# EAGLE board MicroMod-Teensy-Panel (EAGLE 9.6.2), part 1 of 13
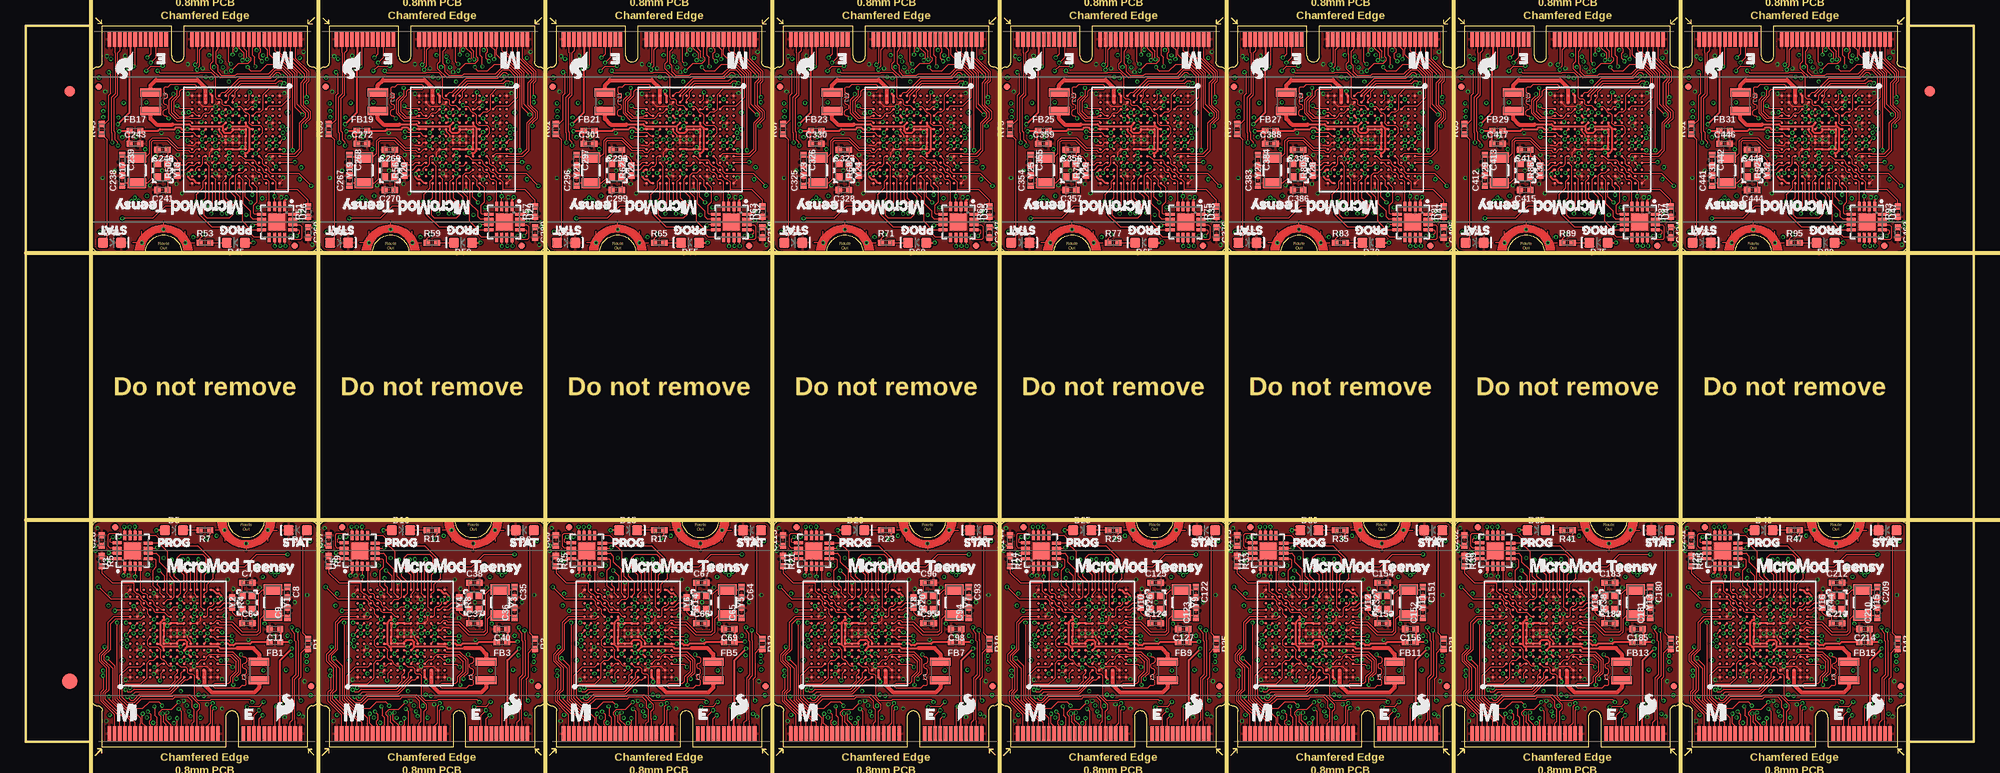
[diagram p0: board, top side]
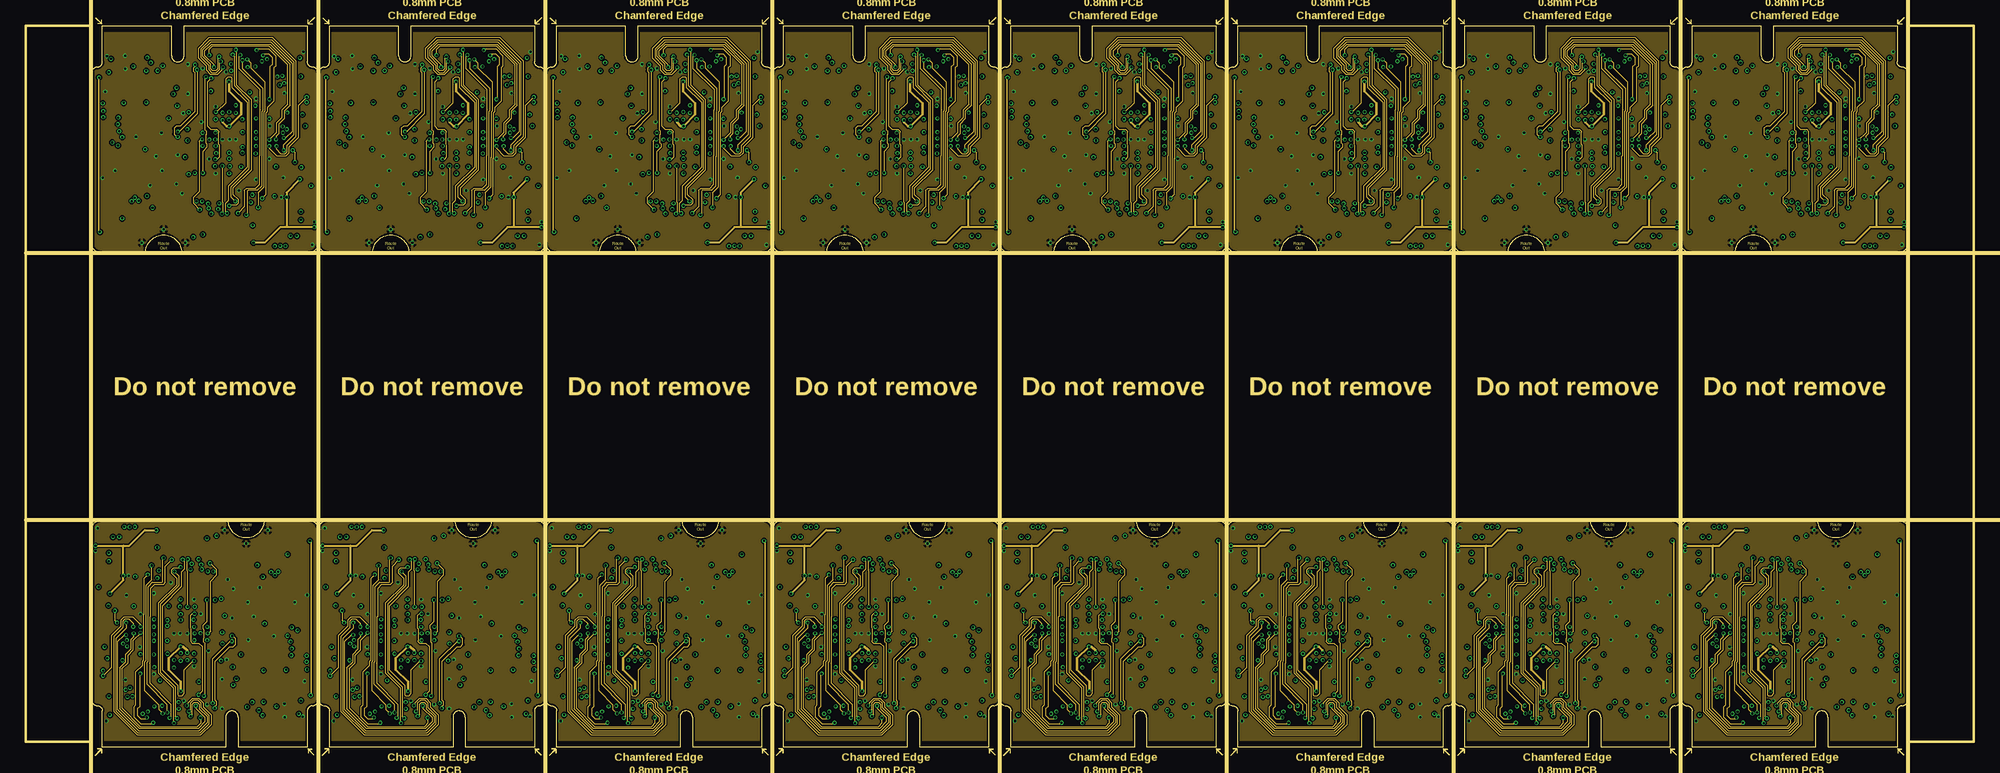
[diagram p1: board, inner layer Route2]
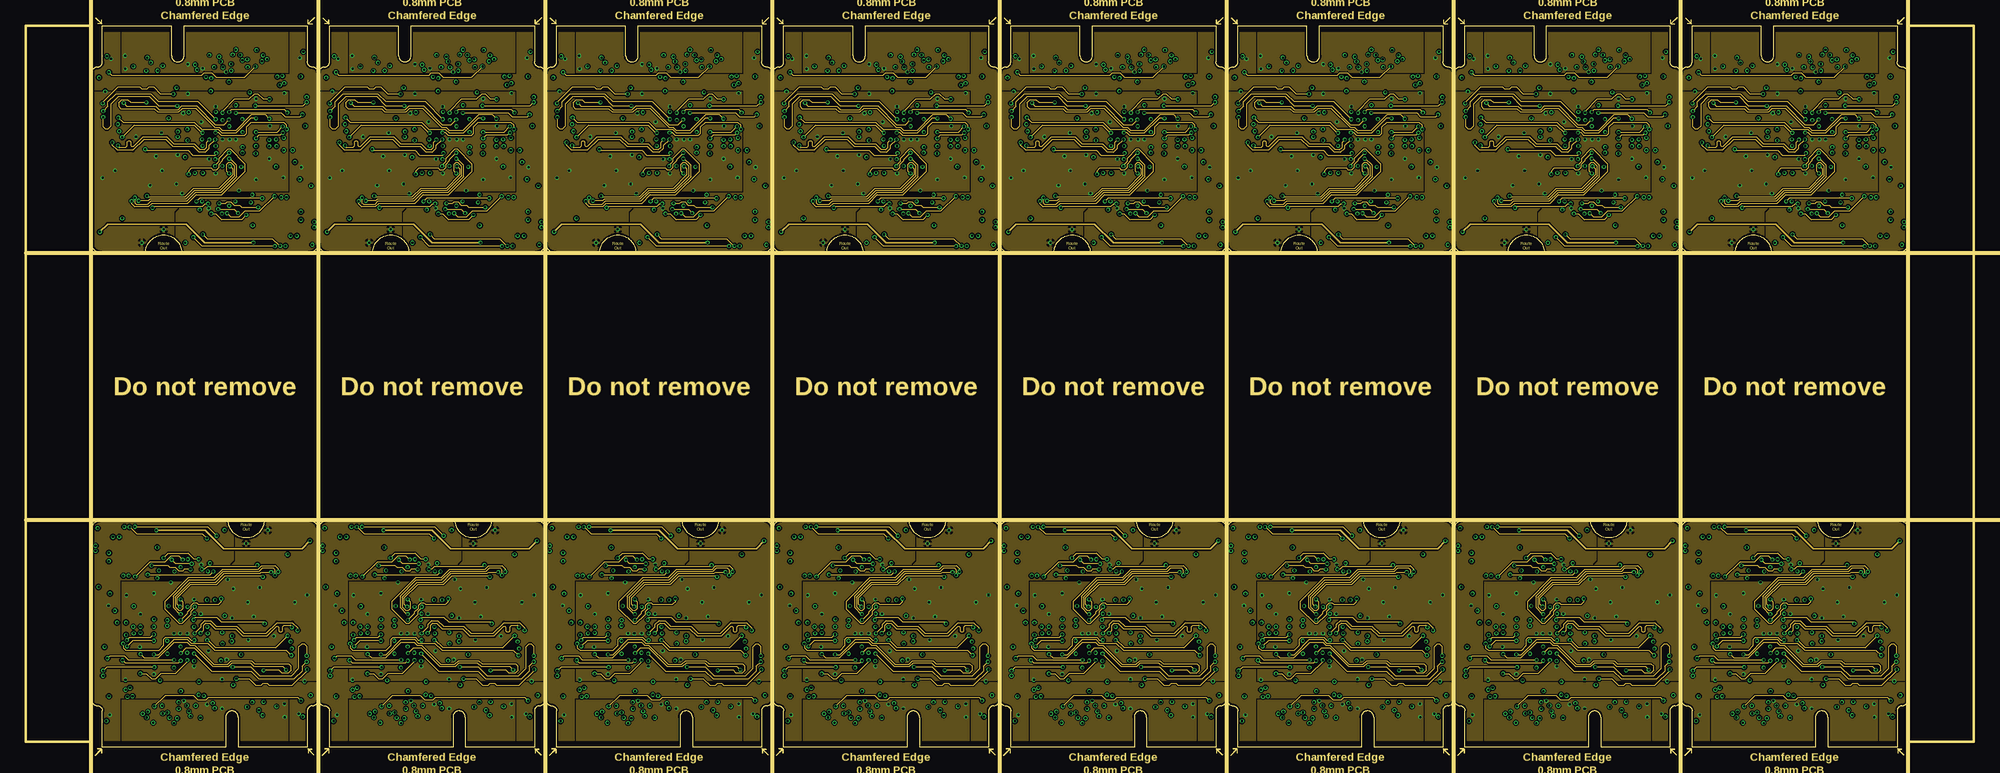
[diagram p2: board, inner layer Route15]
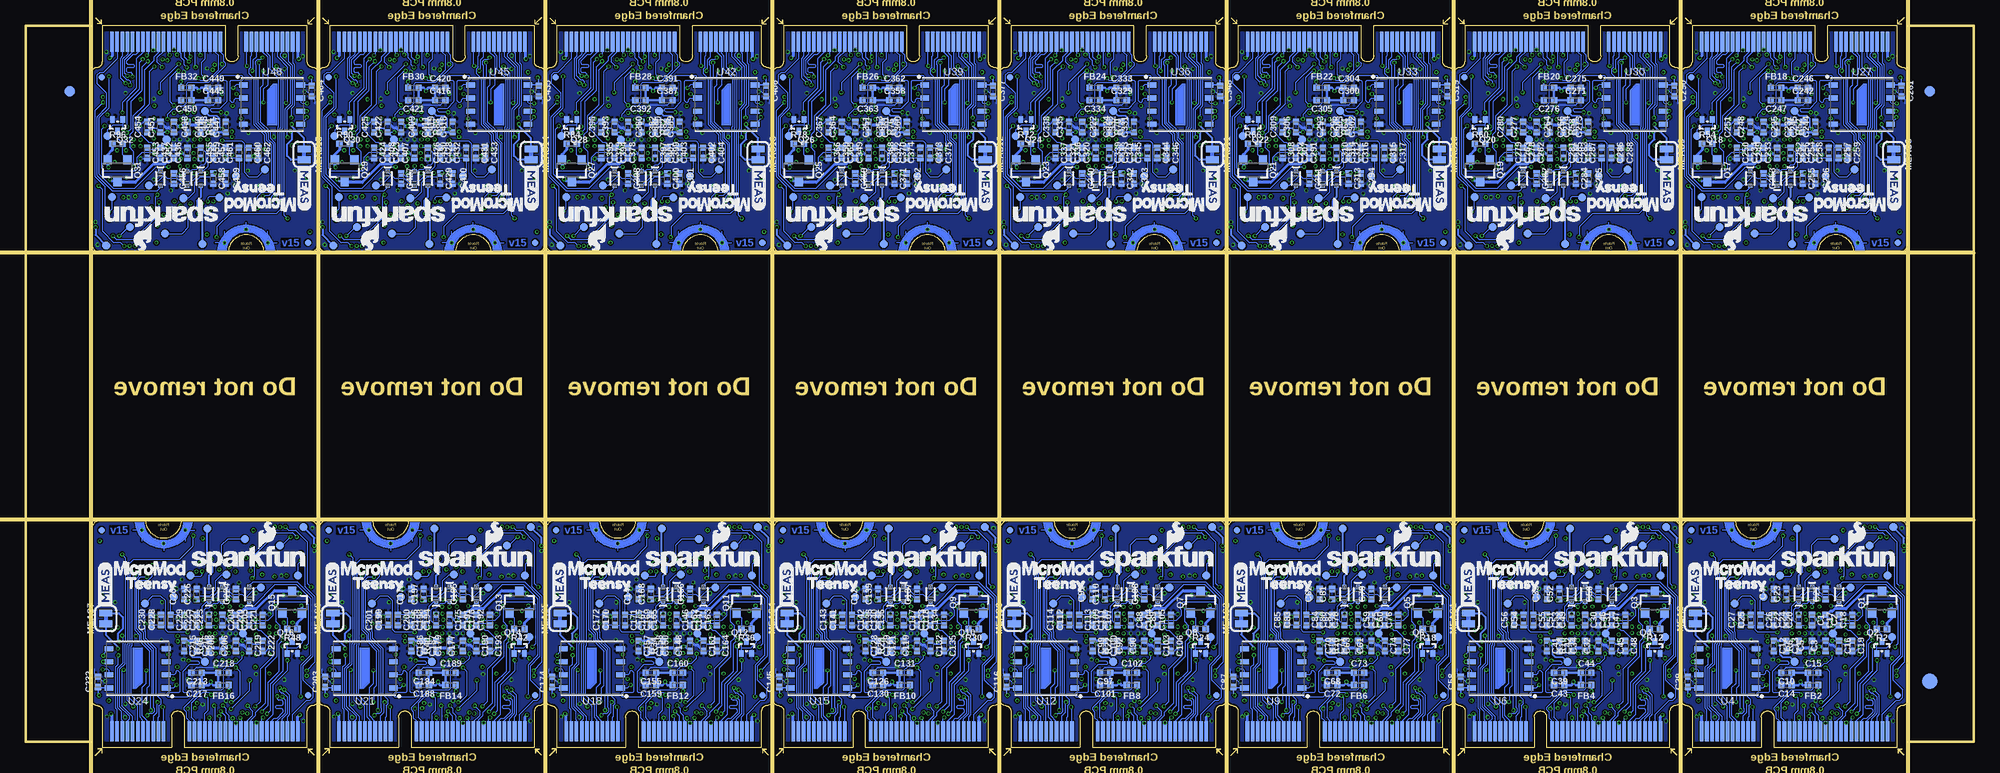
[diagram p3: board, bottom side, seen from below]

Size 188.7 x 69.85 mm. Coordinates in mm from the lower left corner, seen from the top.
Outline: 312 segments
Copper layers (1+2*15+16): Top 0.035mm / dielectric 1.5mm / Route2 0.035mm / dielectric 0.15mm / Route15 0.035mm / dielectric 0.2mm / Bottom 0.035mm
Design rules "MicroMod-Teensy": minimum track width 4mil, minimum drill 0.2mm, track to track 4mil, track to pad 4mil, pad to pad 4mil, via to via 4mil, smd to smd 4mil, copper to edge 6mil, drill to drill 6mil, minimum pad ring 3mil, minimum via ring 3mil, stop-mask expansion 4mil, vias tented up to drill 25mil, thermal gap 10mil
Net classes: 1 90Ohm: width 0.114 mm, clearance 0.127 mm; 2 Clock: width 0.089 mm, clearance 0.178 mm; 3 DCBoost: width 0.381 mm; 4 InternalPower: width 0.152 mm
Milling: 107 lines

## Footprints (pad centres in the part's own frame; a part is rotated, then mirrored left to right if it is on the bottom)
0402-TIGHT = smd 0.6 x 0.6: 1 -0.5,0; 2 0.5,0
LED-0603 = smd 1 x 1: A -0.877,0; C 0.877,0
SOD-523 = smd 0.4 x 0.4: A -0.7,0; C 0.7,0
FIDUCIAL-1X2 = smd 1 x 1: 1 0,0
FIDUCIAL-1.5X3 = smd 1.5 x 1.5: 1 0,0
FIDUCIAL-MICRO = smd 0.635 x 0.635: 1 0,0
M.2-CARD-E-22 = smd 0.35 x 1.45: 1 9.25,1.275; 3 8.75,1.275; 5 8.25,1.275; 7 7.75,1.275; 9 7.25,1.275; 11 6.75,1.275; 13 6.25,1.275; 15 5.75,1.275; 17 5.25,1.275; 19 4.75,1.275; 21 4.25,1.275; 23 3.75,1.275; 33 1.25,1.275; 35 0.75,1.275; 37 0.25,1.275; 39 -0.25,1.275; 41 -0.75,1.275; 43 -1.25,1.275; 45 -1.75,1.275; 47 -2.25,1.275; 49 -2.75,1.275; 51 -3.25,1.275; 53 -3.75,1.275; 55 -4.25,1.275; 57 -4.75,1.275; 59 -5.25,1.275; 61 -5.75,1.275; 63 -6.25,1.275; 65 -6.75,1.275; 67 -7.25,1.275; 69 -7.75,1.275; 71 -8.25,1.275; 73 -8.75,1.275; 75 -9.25,1.275 | smd 0.35 x 1.95 bottom: 2 9,1.525; 4 8.5,1.525; 6 8,1.525; 8 7.5,1.525; 10 7,1.525; 12 6.5,1.525; 14 6,1.525; 16 5.5,1.525; 18 5,1.525; 20 4.5,1.525; 22 4,1.525; 32 1.5,1.525; 34 1,1.525; 36 0.5,1.525; 38 0,1.525; 40 -0.5,1.525; 42 -1,1.525; 44 -1.5,1.525; 46 -2,1.525; 48 -2.5,1.525; 50 -3,1.525; 52 -3.5,1.525; 54 -4,1.525; 56 -4.5,1.525; 58 -5,1.525; 60 -5.5,1.525; 62 -6,1.525; 64 -6.5,1.525; 66 -7,1.525; 68 -7.5,1.525; 70 -8,1.525; 72 -8.5,1.525; 74 -9,1.525 | drill 0.2: GND1 1.9,21; GND2 4,19.7; GND3 6.1,21
1008(2520) = smd 0.8 x 2: 1 -0.9,0; 2 0.9,0
SMT-JUMPER_2_NC_TRACE_SILK = smd 0.66 x 1.27: 1 -0.521,0; 2 0.521,0
SOT23-3 = smd 0.8 x 0.9: 1 -0.95,-1; 2 0.95,-1; 3 0,1.1
SOT-416FL = smd 0.46 x 0.65: 1 -0.5,-1.1; 2 0.5,-1.1; 3 0,0.05
PAD.03X.03 = smd 0.762 x 0.762: P$1 0,0
IMXRT1062 = smd 0.234 x 0.234: A1 -4.225,4.225; A2 -3.575,4.225; A3 -2.925,4.225; A4 -2.275,4.225; A5 -1.625,4.225; A6 -0.975,4.225; A7 -0.325,4.225; A8 0.325,4.225; A9 0.975,4.225; A10 1.625,4.225; A11 2.275,4.225; A12 2.925,4.225; A13 3.575,4.225; A14 4.225,4.225; B1 -4.225,3.575; B2 -3.575,3.575; B3 -2.925,3.575; B4 -2.275,3.575; B5 -1.625,3.575; B6 -0.975,3.575; B7 -0.325,3.575; B8 0.325,3.575; B9 0.975,3.575; B10 1.625,3.575; B11 2.275,3.575; B12 2.925,3.575; B13 3.575,3.575; B14 4.225,3.575; C1 -4.225,2.925; C2 -3.575,2.925; C3 -2.925,2.925; C4 -2.275,2.925; C5 -1.625,2.925; C6 -0.975,2.925; C7 -0.325,2.925; C8 0.325,2.925; C9 0.975,2.925; C10 1.625,2.925; C11 2.275,2.925; C12 2.925,2.925; C13 3.575,2.925; C14 4.225,2.925; D1 -4.225,2.275; D2 -3.575,2.275; D3 -2.925,2.275; D4 -2.275,2.275; D5 -1.625,2.275; D6 -0.975,2.275; D7 -0.325,2.275; D8 0.325,2.275; D9 0.975,2.275; D10 1.625,2.275; D11 2.275,2.275; D12 2.925,2.275; D13 3.575,2.275; D14 4.225,2.275; E1 -4.225,1.625; E2 -3.575,1.625; E3 -2.925,1.625; E4 -2.275,1.625; E5 -1.625,1.625; E6 -0.975,1.625; E7 -0.325,1.625; E8 0.325,1.625; E9 0.975,1.625; E10 1.625,1.625; E11 2.275,1.625; E12 2.925,1.625; E13 3.575,1.625; E14 4.225,1.625; F1 -4.225,0.975; F2 -3.575,0.975; F3 -2.925,0.975; F4 -2.275,0.975; F5 -1.625,0.975; F6 -0.975,0.975; F7 -0.325,0.975; F8 0.325,0.975; F9 0.975,0.975; F10 1.625,0.975; F11 2.275,0.975; F12 2.925,0.975; F13 3.575,0.975; F14 4.225,0.975; G1 -4.225,0.325; G2 -3.575,0.325; G3 -2.925,0.325; G4 -2.275,0.325; G5 -1.625,0.325; G6 -0.975,0.325; G7 -0.325,0.325; G8 0.325,0.325; G9 0.975,0.325; G10 1.625,0.325; G11 2.275,0.325; G12 2.925,0.325; G13 3.575,0.325; G14 4.225,0.325; H1 -4.225,-0.325; H2 -3.575,-0.325; H3 -2.925,-0.325; H4 -2.275,-0.325; H5 -1.625,-0.325; H6 -0.975,-0.325; H7 -0.325,-0.325; H8 0.325,-0.325; H9 0.975,-0.325; H10 1.625,-0.325; H11 2.275,-0.325; H12 2.925,-0.325; H13 3.575,-0.325; H14 4.225,-0.325; J1 -4.225,-0.975; J2 -3.575,-0.975; J3 -2.925,-0.975; J4 -2.275,-0.975; J5 -1.625,-0.975; J6 -0.975,-0.975; J7 -0.325,-0.975; J8 0.325,-0.975; J9 0.975,-0.975; J10 1.625,-0.975; J11 2.275,-0.975; J12 2.925,-0.975; J13 3.575,-0.975; J14 4.225,-0.975; K1 -4.225,-1.625; K2 -3.575,-1.625; K3 -2.925,-1.625; K4 -2.275,-1.625; K5 -1.625,-1.625; K6 -0.975,-1.625; K7 -0.325,-1.625; K8 0.325,-1.625; K9 0.975,-1.625; K10 1.625,-1.625; K11 2.275,-1.625; K12 2.925,-1.625; K13 3.575,-1.625; K14 4.225,-1.625; L1 -4.225,-2.275; L2 -3.575,-2.275; L3 -2.925,-2.275; L4 -2.275,-2.275; L5 -1.625,-2.275; L6 -0.975,-2.275; L7 -0.325,-2.275; L8 0.325,-2.275; L9 0.975,-2.275; L10 1.625,-2.275; L11 2.275,-2.275; L12 2.925,-2.275; L13 3.575,-2.275; L14 4.225,-2.275; M1 -4.225,-2.925; M2 -3.575,-2.925; M3 -2.925,-2.925; M4 -2.275,-2.925; M5 -1.625,-2.925; M6 -0.975,-2.925; M7 -0.325,-2.925; M8 0.325,-2.925; M9 0.975,-2.925; M10 1.625,-2.925; M11 2.275,-2.925; M12 2.925,-2.925; M13 3.575,-2.925; M14 4.225,-2.925; N1 -4.225,-3.575; N2 -3.575,-3.575; N3 -2.925,-3.575; N4 -2.275,-3.575; N5 -1.625,-3.575; N6 -0.975,-3.575; N7 -0.325,-3.575; N8 0.325,-3.575; N9 0.975,-3.575; N10 1.625,-3.575; N11 2.275,-3.575; N12 2.925,-3.575; N13 3.575,-3.575; N14 4.225,-3.575; P1 -4.225,-4.225; P2 -3.575,-4.225; P3 -2.925,-4.225; P4 -2.275,-4.225; P5 -1.625,-4.225; P6 -0.975,-4.225; P7 -0.325,-4.225; P8 0.325,-4.225; P9 0.975,-4.225; P10 1.625,-4.225; P11 2.275,-4.225; P12 2.925,-4.225; P13 3.575,-4.225; P14 4.225,-4.225
QFN-16 = smd 0.9 x 0.29: 1 -1.5,0.75; 2 -1.5,0.25; 3 -1.5,-0.25; 4 -1.5,-0.75; 9 1.5,-0.75; 10 1.5,-0.25; 11 1.5,0.25; 12 1.5,0.75 | smd 0.29 x 0.9: 5 -0.75,-1.5; 6 -0.25,-1.5; 7 0.25,-1.5; 8 0.75,-1.5; 13 0.765,1.5; 14 0.25,1.5; 15 -0.25,1.5; 16 -0.75,1.5 | smd 1.6 x 1.6: 17 0,0
WSON-8-6X5-SKINNY_CENTERPAD = smd 0.85 x 0.5: 1 -2.775,1.905; 2 -2.775,0.635; 3 -2.775,-0.635; 4 -2.775,-1.905; 5 2.775,-1.905; 6 2.775,-0.635; 7 2.775,0.635; 8 2.775,1.905
CRYSTAL-SMD-3.2X1.5MM = smd 1 x 1.8: P$1 -1.25,0; P$2 1.25,0
CRYSTAL-SMD-2.0X1.6MM = smd 0.75 x 0.7: 1 -0.675,-0.5; 2 0.675,-0.5; 3 0.675,0.5; 4 -0.675,0.5

## Placement (x,y rotation side)
C1  2.2uF  [0402-TIGHT]  15.65,12.3 270 bottom
C2  4.7uF  [0402-TIGHT]  14.35,12.3 270 bottom
C3  0.22uF  [0402-TIGHT]  14.35,9.8 90 bottom
C4  0.22uF  [0402-TIGHT]  19.35,14.8 90 bottom
C5  10nF  [0402-TIGHT]  15.65,9.8 90 bottom
C6  12pF  [0402-TIGHT]  21.45,12 0 top
C7  12pF  [0402-TIGHT]  21.45,15.9 0 top
C8  20pF  [0402-TIGHT]  25.35,15 270 top
C9  20pF  [0402-TIGHT]  25.35,13 90 top
C10  10uF  [0402-TIGHT]  18.15,7.2 180 bottom
C11  2.2uF  [0402-TIGHT]  24.13,11.43 180 top
C12  0.22uF  [0402-TIGHT]  19.35,9.8 270 bottom
C13  0.22uF  [0402-TIGHT]  18.15,9.8 270 bottom
C14  4.7uF  [0402-TIGHT]  18.15,6 180 bottom
C15  0.22uF  [0402-TIGHT]  15.55,7.2 0 bottom
C16  10nF  [0402-TIGHT]  13.05,9.8 270 bottom
C17  0.22uF  [0402-TIGHT]  13.05,12.3 90 bottom
C18  4.7uF  [0402-TIGHT]  11.75,12.3 90 bottom
C19  10uF  [0402-TIGHT]  11.75,9.8 270 bottom
C20  0.22uF  [0402-TIGHT]  16.95,12.3 90 bottom
C21  10uF  [0402-TIGHT]  14.35,14.8 90 bottom
C22  0.22uF  [0402-TIGHT]  18.15,12.3 90 bottom
C23  0.22uF  [0402-TIGHT]  18.15,14.8 90 bottom
C24  0.22uF  [0402-TIGHT]  19.35,12.3 270 bottom
C25  0.22uF  [0402-TIGHT]  21.6,12.31 90 bottom
C26  4.7uF  [0402-TIGHT]  20.65,12.3 270 bottom
C27  4.7uF  [0402-TIGHT]  22.55,12.31 90 bottom
C28  0.22uF  [0402-TIGHT]  7.35,20 90 top
C29  0.22uF  [0402-TIGHT]  27.7,6.31 90 bottom
C30  2.2uF  [0402-TIGHT]  37.65,12.3 270 bottom
C31  4.7uF  [0402-TIGHT]  36.35,12.3 270 bottom
C32  0.22uF  [0402-TIGHT]  36.35,9.8 90 bottom
C33  0.22uF  [0402-TIGHT]  41.35,14.8 90 bottom
C34  10nF  [0402-TIGHT]  37.65,9.8 90 bottom
C35  20pF  [0402-TIGHT]  47.35,15 270 top
C36  20pF  [0402-TIGHT]  47.35,13 90 top
C37  12pF  [0402-TIGHT]  43.45,12 0 top
C38  12pF  [0402-TIGHT]  43.45,15.9 0 top
C39  10uF  [0402-TIGHT]  40.15,7.2 180 bottom
C40  2.2uF  [0402-TIGHT]  46.13,11.43 180 top
C41  0.22uF  [0402-TIGHT]  41.35,9.8 270 bottom
C42  0.22uF  [0402-TIGHT]  40.15,9.8 270 bottom
C43  4.7uF  [0402-TIGHT]  40.15,6 180 bottom
C44  0.22uF  [0402-TIGHT]  37.55,7.2 0 bottom
C45  10nF  [0402-TIGHT]  35.05,9.8 270 bottom
C46  0.22uF  [0402-TIGHT]  35.05,12.3 90 bottom
C47  4.7uF  [0402-TIGHT]  33.75,12.3 90 bottom
C48  10uF  [0402-TIGHT]  33.75,9.8 270 bottom
C49  0.22uF  [0402-TIGHT]  38.95,12.3 90 bottom
C50  10uF  [0402-TIGHT]  36.35,14.8 90 bottom
C51  0.22uF  [0402-TIGHT]  40.15,12.3 90 bottom
C52  0.22uF  [0402-TIGHT]  40.15,14.8 90 bottom
C53  0.22uF  [0402-TIGHT]  41.35,12.3 270 bottom
C54  0.22uF  [0402-TIGHT]  43.6,12.31 90 bottom
C55  4.7uF  [0402-TIGHT]  42.65,12.3 270 bottom
C56  4.7uF  [0402-TIGHT]  44.55,12.31 90 bottom
C57  0.22uF  [0402-TIGHT]  29.35,20 90 top
C58  0.22uF  [0402-TIGHT]  49.7,6.31 90 bottom
C59  2.2uF  [0402-TIGHT]  59.65,12.3 270 bottom
C60  4.7uF  [0402-TIGHT]  58.35,12.3 270 bottom
C61  0.22uF  [0402-TIGHT]  58.35,9.8 90 bottom
C62  0.22uF  [0402-TIGHT]  63.35,14.8 90 bottom
C63  10nF  [0402-TIGHT]  59.65,9.8 90 bottom
C64  20pF  [0402-TIGHT]  69.35,15 270 top
C65  20pF  [0402-TIGHT]  69.35,13 90 top
C66  12pF  [0402-TIGHT]  65.45,12 0 top
C67  12pF  [0402-TIGHT]  65.45,15.9 0 top
C68  10uF  [0402-TIGHT]  62.15,7.2 180 bottom
C69  2.2uF  [0402-TIGHT]  68.13,11.43 180 top
C70  0.22uF  [0402-TIGHT]  63.35,9.8 270 bottom
C71  0.22uF  [0402-TIGHT]  62.15,9.8 270 bottom
C72  4.7uF  [0402-TIGHT]  62.15,6 180 bottom
C73  0.22uF  [0402-TIGHT]  59.55,7.2 0 bottom
C74  10nF  [0402-TIGHT]  57.05,9.8 270 bottom
C75  0.22uF  [0402-TIGHT]  57.05,12.3 90 bottom
C76  4.7uF  [0402-TIGHT]  55.75,12.3 90 bottom
C77  10uF  [0402-TIGHT]  55.75,9.8 270 bottom
C78  0.22uF  [0402-TIGHT]  60.95,12.3 90 bottom
C79  10uF  [0402-TIGHT]  58.35,14.8 90 bottom
C80  0.22uF  [0402-TIGHT]  62.15,12.3 90 bottom
C81  0.22uF  [0402-TIGHT]  62.15,14.8 90 bottom
C82  0.22uF  [0402-TIGHT]  63.35,12.3 270 bottom
C83  0.22uF  [0402-TIGHT]  65.6,12.31 90 bottom
C84  4.7uF  [0402-TIGHT]  64.65,12.3 270 bottom
C85  4.7uF  [0402-TIGHT]  66.55,12.31 90 bottom
C86  0.22uF  [0402-TIGHT]  51.35,20 90 top
C87  0.22uF  [0402-TIGHT]  71.7,6.31 90 bottom
C88  2.2uF  [0402-TIGHT]  81.65,12.3 270 bottom
C89  4.7uF  [0402-TIGHT]  80.35,12.3 270 bottom
C90  0.22uF  [0402-TIGHT]  80.35,9.8 90 bottom
C91  0.22uF  [0402-TIGHT]  85.35,14.8 90 bottom
C92  10nF  [0402-TIGHT]  81.65,9.8 90 bottom
C93  20pF  [0402-TIGHT]  91.35,15 270 top
C94  20pF  [0402-TIGHT]  91.35,13 90 top
C95  12pF  [0402-TIGHT]  87.45,12 0 top
C96  12pF  [0402-TIGHT]  87.45,15.9 0 top
C97  10uF  [0402-TIGHT]  84.15,7.2 180 bottom
C98  2.2uF  [0402-TIGHT]  90.13,11.43 180 top
C99  0.22uF  [0402-TIGHT]  85.35,9.8 270 bottom
C100  0.22uF  [0402-TIGHT]  84.15,9.8 270 bottom
C101  4.7uF  [0402-TIGHT]  84.15,6 180 bottom
C102  0.22uF  [0402-TIGHT]  81.55,7.2 0 bottom
C103  10nF  [0402-TIGHT]  79.05,9.8 270 bottom
C104  0.22uF  [0402-TIGHT]  79.05,12.3 90 bottom
C105  4.7uF  [0402-TIGHT]  77.75,12.3 90 bottom
C106  10uF  [0402-TIGHT]  77.75,9.8 270 bottom
C107  0.22uF  [0402-TIGHT]  82.95,12.3 90 bottom
C108  10uF  [0402-TIGHT]  80.35,14.8 90 bottom
C109  0.22uF  [0402-TIGHT]  84.15,12.3 90 bottom
C110  0.22uF  [0402-TIGHT]  84.15,14.8 90 bottom
C111  0.22uF  [0402-TIGHT]  85.35,12.3 270 bottom
C112  0.22uF  [0402-TIGHT]  87.6,12.31 90 bottom
C113  4.7uF  [0402-TIGHT]  86.65,12.3 270 bottom
C114  4.7uF  [0402-TIGHT]  88.55,12.31 90 bottom
C115  0.22uF  [0402-TIGHT]  73.35,20 90 top
C116  0.22uF  [0402-TIGHT]  93.7,6.31 90 bottom
C117  2.2uF  [0402-TIGHT]  103.65,12.3 270 bottom
C118  4.7uF  [0402-TIGHT]  102.35,12.3 270 bottom
C119  0.22uF  [0402-TIGHT]  102.35,9.8 90 bottom
C120  0.22uF  [0402-TIGHT]  107.35,14.8 90 bottom
C121  10nF  [0402-TIGHT]  103.65,9.8 90 bottom
C122  20pF  [0402-TIGHT]  113.35,15 270 top
C123  20pF  [0402-TIGHT]  113.35,13 90 top
C124  12pF  [0402-TIGHT]  109.45,12 0 top
C125  12pF  [0402-TIGHT]  109.45,15.9 0 top
C126  10uF  [0402-TIGHT]  106.15,7.2 180 bottom
C127  2.2uF  [0402-TIGHT]  112.13,11.43 180 top
C128  0.22uF  [0402-TIGHT]  107.35,9.8 270 bottom
C129  0.22uF  [0402-TIGHT]  106.15,9.8 270 bottom
C130  4.7uF  [0402-TIGHT]  106.15,6 180 bottom
C131  0.22uF  [0402-TIGHT]  103.55,7.2 0 bottom
C132  10nF  [0402-TIGHT]  101.05,9.8 270 bottom
C133  0.22uF  [0402-TIGHT]  101.05,12.3 90 bottom
C134  4.7uF  [0402-TIGHT]  99.75,12.3 90 bottom
C135  10uF  [0402-TIGHT]  99.75,9.8 270 bottom
C136  0.22uF  [0402-TIGHT]  104.95,12.3 90 bottom
C137  10uF  [0402-TIGHT]  102.35,14.8 90 bottom
C138  0.22uF  [0402-TIGHT]  106.15,12.3 90 bottom
C139  0.22uF  [0402-TIGHT]  106.15,14.8 90 bottom
C140  0.22uF  [0402-TIGHT]  107.35,12.3 270 bottom
C141  0.22uF  [0402-TIGHT]  109.6,12.31 90 bottom
C142  4.7uF  [0402-TIGHT]  108.65,12.3 270 bottom
C143  4.7uF  [0402-TIGHT]  110.55,12.31 90 bottom
C144  0.22uF  [0402-TIGHT]  95.35,20 90 top
C145  0.22uF  [0402-TIGHT]  115.7,6.31 90 bottom
C146  2.2uF  [0402-TIGHT]  125.65,12.3 270 bottom
C147  4.7uF  [0402-TIGHT]  124.35,12.3 270 bottom
C148  0.22uF  [0402-TIGHT]  124.35,9.8 90 bottom
C149  0.22uF  [0402-TIGHT]  129.35,14.8 90 bottom
C150  10nF  [0402-TIGHT]  125.65,9.8 90 bottom
C151  20pF  [0402-TIGHT]  135.35,15 270 top
C152  20pF  [0402-TIGHT]  135.35,13 90 top
C153  12pF  [0402-TIGHT]  131.45,12 0 top
C154  12pF  [0402-TIGHT]  131.45,15.9 0 top
C155  10uF  [0402-TIGHT]  128.15,7.2 180 bottom
C156  2.2uF  [0402-TIGHT]  134.13,11.43 180 top
C157  0.22uF  [0402-TIGHT]  129.35,9.8 270 bottom
C158  0.22uF  [0402-TIGHT]  128.15,9.8 270 bottom
C159  4.7uF  [0402-TIGHT]  128.15,6 180 bottom
C160  0.22uF  [0402-TIGHT]  125.55,7.2 0 bottom
C161  10nF  [0402-TIGHT]  123.05,9.8 270 bottom
C162  0.22uF  [0402-TIGHT]  123.05,12.3 90 bottom
C163  4.7uF  [0402-TIGHT]  121.75,12.3 90 bottom
C164  10uF  [0402-TIGHT]  121.75,9.8 270 bottom
C165  0.22uF  [0402-TIGHT]  126.95,12.3 90 bottom
C166  10uF  [0402-TIGHT]  124.35,14.8 90 bottom
C167  0.22uF  [0402-TIGHT]  128.15,12.3 90 bottom
C168  0.22uF  [0402-TIGHT]  128.15,14.8 90 bottom
C169  0.22uF  [0402-TIGHT]  129.35,12.3 270 bottom
C170  0.22uF  [0402-TIGHT]  131.6,12.31 90 bottom
C171  4.7uF  [0402-TIGHT]  130.65,12.3 270 bottom
C172  4.7uF  [0402-TIGHT]  132.55,12.31 90 bottom
C173  0.22uF  [0402-TIGHT]  117.35,20 90 top
C174  0.22uF  [0402-TIGHT]  137.7,6.31 90 bottom
C175  2.2uF  [0402-TIGHT]  147.65,12.3 270 bottom
C176  4.7uF  [0402-TIGHT]  146.35,12.3 270 bottom
C177  0.22uF  [0402-TIGHT]  146.35,9.8 90 bottom
C178  0.22uF  [0402-TIGHT]  151.35,14.8 90 bottom
C179  10nF  [0402-TIGHT]  147.65,9.8 90 bottom
C180  20pF  [0402-TIGHT]  157.35,15 270 top
C181  20pF  [0402-TIGHT]  157.35,13 90 top
C182  12pF  [0402-TIGHT]  153.45,12 0 top
C183  12pF  [0402-TIGHT]  153.45,15.9 0 top
C184  10uF  [0402-TIGHT]  150.15,7.2 180 bottom
C185  2.2uF  [0402-TIGHT]  156.13,11.43 180 top
C186  0.22uF  [0402-TIGHT]  151.35,9.8 270 bottom
C187  0.22uF  [0402-TIGHT]  150.15,9.8 270 bottom
C188  4.7uF  [0402-TIGHT]  150.15,6 180 bottom
C189  0.22uF  [0402-TIGHT]  147.55,7.2 0 bottom
C190  10nF  [0402-TIGHT]  145.05,9.8 270 bottom
C191  0.22uF  [0402-TIGHT]  145.05,12.3 90 bottom
C192  4.7uF  [0402-TIGHT]  143.75,12.3 90 bottom
C193  10uF  [0402-TIGHT]  143.75,9.8 270 bottom
C194  0.22uF  [0402-TIGHT]  148.95,12.3 90 bottom
C195  10uF  [0402-TIGHT]  146.35,14.8 90 bottom
C196  0.22uF  [0402-TIGHT]  150.15,12.3 90 bottom
C197  0.22uF  [0402-TIGHT]  150.15,14.8 90 bottom
C198  0.22uF  [0402-TIGHT]  151.35,12.3 270 bottom
C199  0.22uF  [0402-TIGHT]  153.6,12.31 90 bottom
C200  4.7uF  [0402-TIGHT]  152.65,12.3 270 bottom
C201  4.7uF  [0402-TIGHT]  154.55,12.31 90 bottom
C202  0.22uF  [0402-TIGHT]  139.35,20 90 top
C203  0.22uF  [0402-TIGHT]  159.7,6.31 90 bottom
C204  2.2uF  [0402-TIGHT]  169.65,12.3 270 bottom
C205  4.7uF  [0402-TIGHT]  168.35,12.3 270 bottom
C206  0.22uF  [0402-TIGHT]  168.35,9.8 90 bottom
C207  0.22uF  [0402-TIGHT]  173.35,14.8 90 bottom
C208  10nF  [0402-TIGHT]  169.65,9.8 90 bottom
C209  20pF  [0402-TIGHT]  179.35,15 270 top
C210  20pF  [0402-TIGHT]  179.35,13 90 top
C211  12pF  [0402-TIGHT]  175.45,12 0 top
C212  12pF  [0402-TIGHT]  175.45,15.9 0 top
C213  10uF  [0402-TIGHT]  172.15,7.2 180 bottom
C214  2.2uF  [0402-TIGHT]  178.13,11.43 180 top
C215  0.22uF  [0402-TIGHT]  173.35,9.8 270 bottom
C216  0.22uF  [0402-TIGHT]  172.15,9.8 270 bottom
C217  4.7uF  [0402-TIGHT]  172.15,6 180 bottom
C218  0.22uF  [0402-TIGHT]  169.55,7.2 0 bottom
C219  10nF  [0402-TIGHT]  167.05,9.8 270 bottom
C220  0.22uF  [0402-TIGHT]  167.05,12.3 90 bottom
C221  4.7uF  [0402-TIGHT]  165.75,12.3 90 bottom
C222  10uF  [0402-TIGHT]  165.75,9.8 270 bottom
C223  0.22uF  [0402-TIGHT]  170.95,12.3 90 bottom
C224  10uF  [0402-TIGHT]  168.35,14.8 90 bottom
C225  0.22uF  [0402-TIGHT]  172.15,12.3 90 bottom
C226  0.22uF  [0402-TIGHT]  172.15,14.8 90 bottom
C227  0.22uF  [0402-TIGHT]  173.35,12.3 270 bottom
C228  0.22uF  [0402-TIGHT]  175.6,12.31 90 bottom
C229  4.7uF  [0402-TIGHT]  174.65,12.3 270 bottom
C230  4.7uF  [0402-TIGHT]  176.55,12.31 90 bottom
C231  0.22uF  [0402-TIGHT]  161.35,20 90 top
C232  0.22uF  [0402-TIGHT]  181.7,6.31 90 bottom
C233  2.2uF  [0402-TIGHT]  19.05,57.55 90 bottom
C234  4.7uF  [0402-TIGHT]  20.35,57.55 90 bottom
C235  0.22uF  [0402-TIGHT]  20.35,60.05 270 bottom
C236  0.22uF  [0402-TIGHT]  15.35,55.05 270 bottom
C237  10nF  [0402-TIGHT]  19.05,60.05 270 bottom
C238  20pF  [0402-TIGHT]  9.35,54.85 90 top
C239  20pF  [0402-TIGHT]  9.35,56.85 270 top
C240  12pF  [0402-TIGHT]  13.25,57.85 180 top
C241  12pF  [0402-TIGHT]  13.25,53.95 180 top
C242  10uF  [0402-TIGHT]  16.55,62.65 0 bottom
C243  2.2uF  [0402-TIGHT]  10.57,58.42 0 top
C244  0.22uF  [0402-TIGHT]  15.35,60.05 90 bottom
C245  0.22uF  [0402-TIGHT]  16.55,60.05 90 bottom
C246  4.7uF  [0402-TIGHT]  16.55,63.85 0 bottom
C247  0.22uF  [0402-TIGHT]  19.15,62.65 180 bottom
C248  10nF  [0402-TIGHT]  21.65,60.05 90 bottom
C249  0.22uF  [0402-TIGHT]  21.65,57.55 270 bottom
C250  4.7uF  [0402-TIGHT]  22.95,57.55 270 bottom
C251  10uF  [0402-TIGHT]  22.95,60.05 90 bottom
C252  0.22uF  [0402-TIGHT]  17.75,57.55 270 bottom
C253  10uF  [0402-TIGHT]  20.35,55.05 270 bottom
C254  0.22uF  [0402-TIGHT]  16.55,57.55 270 bottom
C255  0.22uF  [0402-TIGHT]  16.55,55.05 270 bottom
C256  0.22uF  [0402-TIGHT]  15.35,57.55 90 bottom
C257  0.22uF  [0402-TIGHT]  13.1,57.54 270 bottom
C258  4.7uF  [0402-TIGHT]  14.05,57.55 90 bottom
C259  4.7uF  [0402-TIGHT]  12.15,57.54 270 bottom
C260  0.22uF  [0402-TIGHT]  27.35,49.85 270 top
C261  0.22uF  [0402-TIGHT]  7,63.54 270 bottom
C262  2.2uF  [0402-TIGHT]  41.05,57.55 90 bottom
C263  4.7uF  [0402-TIGHT]  42.35,57.55 90 bottom
C264  0.22uF  [0402-TIGHT]  42.35,60.05 270 bottom
C265  0.22uF  [0402-TIGHT]  37.35,55.05 270 bottom
C266  10nF  [0402-TIGHT]  41.05,60.05 270 bottom
C267  20pF  [0402-TIGHT]  31.35,54.85 90 top
C268  20pF  [0402-TIGHT]  31.35,56.85 270 top
C269  12pF  [0402-TIGHT]  35.25,57.85 180 top
C270  12pF  [0402-TIGHT]  35.25,53.95 180 top
C271  10uF  [0402-TIGHT]  38.55,62.65 0 bottom
C272  2.2uF  [0402-TIGHT]  32.57,58.42 0 top
C273  0.22uF  [0402-TIGHT]  37.35,60.05 90 bottom
C274  0.22uF  [0402-TIGHT]  38.55,60.05 90 bottom
C275  4.7uF  [0402-TIGHT]  38.55,63.85 0 bottom
C276  0.22uF  [0402-TIGHT]  41.15,62.65 180 bottom
C277  10nF  [0402-TIGHT]  43.65,60.05 90 bottom
C278  0.22uF  [0402-TIGHT]  43.65,57.55 270 bottom
C279  4.7uF  [0402-TIGHT]  44.95,57.55 270 bottom
C280  10uF  [0402-TIGHT]  44.95,60.05 90 bottom
C281  0.22uF  [0402-TIGHT]  39.75,57.55 270 bottom
C282  10uF  [0402-TIGHT]  42.35,55.05 270 bottom
C283  0.22uF  [0402-TIGHT]  38.55,57.55 270 bottom
C284  0.22uF  [0402-TIGHT]  38.55,55.05 270 bottom
C285  0.22uF  [0402-TIGHT]  37.35,57.55 90 bottom
C286  0.22uF  [0402-TIGHT]  35.1,57.54 270 bottom
C287  4.7uF  [0402-TIGHT]  36.05,57.55 90 bottom
C288  4.7uF  [0402-TIGHT]  34.15,57.54 270 bottom
C289  0.22uF  [0402-TIGHT]  49.35,49.85 270 top
C290  0.22uF  [0402-TIGHT]  29,63.54 270 bottom
C291  2.2uF  [0402-TIGHT]  63.05,57.55 90 bottom
C292  4.7uF  [0402-TIGHT]  64.35,57.55 90 bottom
C293  0.22uF  [0402-TIGHT]  64.35,60.05 270 bottom
C294  0.22uF  [0402-TIGHT]  59.35,55.05 270 bottom
C295  10nF  [0402-TIGHT]  63.05,60.05 270 bottom
C296  20pF  [0402-TIGHT]  53.35,54.85 90 top
C297  20pF  [0402-TIGHT]  53.35,56.85 270 top
C298  12pF  [0402-TIGHT]  57.25,57.85 180 top
C299  12pF  [0402-TIGHT]  57.25,53.95 180 top
C300  10uF  [0402-TIGHT]  60.55,62.65 0 bottom
C301  2.2uF  [0402-TIGHT]  54.57,58.42 0 top
C302  0.22uF  [0402-TIGHT]  59.35,60.05 90 bottom
C303  0.22uF  [0402-TIGHT]  60.55,60.05 90 bottom
C304  4.7uF  [0402-TIGHT]  60.55,63.85 0 bottom
C305  0.22uF  [0402-TIGHT]  63.15,62.65 180 bottom
C306  10nF  [0402-TIGHT]  65.65,60.05 90 bottom
C307  0.22uF  [0402-TIGHT]  65.65,57.55 270 bottom
C308  4.7uF  [0402-TIGHT]  66.95,57.55 270 bottom
C309  10uF  [0402-TIGHT]  66.95,60.05 90 bottom
C310  0.22uF  [0402-TIGHT]  61.75,57.55 270 bottom
C311  10uF  [0402-TIGHT]  64.35,55.05 270 bottom
C312  0.22uF  [0402-TIGHT]  60.55,57.55 270 bottom
C313  0.22uF  [0402-TIGHT]  60.55,55.05 270 bottom
C314  0.22uF  [0402-TIGHT]  59.35,57.55 90 bottom
C315  0.22uF  [0402-TIGHT]  57.1,57.54 270 bottom
C316  4.7uF  [0402-TIGHT]  58.05,57.55 90 bottom
C317  4.7uF  [0402-TIGHT]  56.15,57.54 270 bottom
C318  0.22uF  [0402-TIGHT]  71.35,49.85 270 top
C319  0.22uF  [0402-TIGHT]  51,63.54 270 bottom
C320  2.2uF  [0402-TIGHT]  85.05,57.55 90 bottom
C321  4.7uF  [0402-TIGHT]  86.35,57.55 90 bottom
C322  0.22uF  [0402-TIGHT]  86.35,60.05 270 bottom
C323  0.22uF  [0402-TIGHT]  81.35,55.05 270 bottom
C324  10nF  [0402-TIGHT]  85.05,60.05 270 bottom
C325  20pF  [0402-TIGHT]  75.35,54.85 90 top
C326  20pF  [0402-TIGHT]  75.35,56.85 270 top
C327  12pF  [0402-TIGHT]  79.25,57.85 180 top
C328  12pF  [0402-TIGHT]  79.25,53.95 180 top
C329  10uF  [0402-TIGHT]  82.55,62.65 0 bottom
C330  2.2uF  [0402-TIGHT]  76.57,58.42 0 top
C331  0.22uF  [0402-TIGHT]  81.35,60.05 90 bottom
C332  0.22uF  [0402-TIGHT]  82.55,60.05 90 bottom
C333  4.7uF  [0402-TIGHT]  82.55,63.85 0 bottom
C334  0.22uF  [0402-TIGHT]  85.15,62.65 180 bottom
C335  10nF  [0402-TIGHT]  87.65,60.05 90 bottom
C336  0.22uF  [0402-TIGHT]  87.65,57.55 270 bottom
C337  4.7uF  [0402-TIGHT]  88.95,57.55 270 bottom
C338  10uF  [0402-TIGHT]  88.95,60.05 90 bottom
C339  0.22uF  [0402-TIGHT]  83.75,57.55 270 bottom
C340  10uF  [0402-TIGHT]  86.35,55.05 270 bottom
C341  0.22uF  [0402-TIGHT]  82.55,57.55 270 bottom
C342  0.22uF  [0402-TIGHT]  82.55,55.05 270 bottom
C343  0.22uF  [0402-TIGHT]  81.35,57.55 90 bottom
C344  0.22uF  [0402-TIGHT]  79.1,57.54 270 bottom
C345  4.7uF  [0402-TIGHT]  80.05,57.55 90 bottom
C346  4.7uF  [0402-TIGHT]  78.15,57.54 270 bottom
C347  0.22uF  [0402-TIGHT]  93.35,49.85 270 top
C348  0.22uF  [0402-TIGHT]  73,63.54 270 bottom
C349  2.2uF  [0402-TIGHT]  107.05,57.55 90 bottom
C350  4.7uF  [0402-TIGHT]  108.35,57.55 90 bottom
C351  0.22uF  [0402-TIGHT]  108.35,60.05 270 bottom
C352  0.22uF  [0402-TIGHT]  103.35,55.05 270 bottom
C353  10nF  [0402-TIGHT]  107.05,60.05 270 bottom
C354  20pF  [0402-TIGHT]  97.35,54.85 90 top
C355  20pF  [0402-TIGHT]  97.35,56.85 270 top
C356  12pF  [0402-TIGHT]  101.25,57.85 180 top
C357  12pF  [0402-TIGHT]  101.25,53.95 180 top
C358  10uF  [0402-TIGHT]  104.55,62.65 0 bottom
C359  2.2uF  [0402-TIGHT]  98.57,58.42 0 top
C360  0.22uF  [0402-TIGHT]  103.35,60.05 90 bottom
C361  0.22uF  [0402-TIGHT]  104.55,60.05 90 bottom
C362  4.7uF  [0402-TIGHT]  104.55,63.85 0 bottom
C363  0.22uF  [0402-TIGHT]  107.15,62.65 180 bottom
C364  10nF  [0402-TIGHT]  109.65,60.05 90 bottom
C365  0.22uF  [0402-TIGHT]  109.65,57.55 270 bottom
C366  4.7uF  [0402-TIGHT]  110.95,57.55 270 bottom
C367  10uF  [0402-TIGHT]  110.95,60.05 90 bottom
C368  0.22uF  [0402-TIGHT]  105.75,57.55 270 bottom
C369  10uF  [0402-TIGHT]  108.35,55.05 270 bottom
C370  0.22uF  [0402-TIGHT]  104.55,57.55 270 bottom
C371  0.22uF  [0402-TIGHT]  104.55,55.05 270 bottom
C372  0.22uF  [0402-TIGHT]  103.35,57.55 90 bottom
C373  0.22uF  [0402-TIGHT]  101.1,57.54 270 bottom
C374  4.7uF  [0402-TIGHT]  102.05,57.55 90 bottom
C375  4.7uF  [0402-TIGHT]  100.15,57.54 270 bottom
C376  0.22uF  [0402-TIGHT]  115.35,49.85 270 top
C377  0.22uF  [0402-TIGHT]  95,63.54 270 bottom
C378  2.2uF  [0402-TIGHT]  129.05,57.55 90 bottom
C379  4.7uF  [0402-TIGHT]  130.35,57.55 90 bottom
C380  0.22uF  [0402-TIGHT]  130.35,60.05 270 bottom
C381  0.22uF  [0402-TIGHT]  125.35,55.05 270 bottom
C382  10nF  [0402-TIGHT]  129.05,60.05 270 bottom
C383  20pF  [0402-TIGHT]  119.35,54.85 90 top
C384  20pF  [0402-TIGHT]  119.35,56.85 270 top
C385  12pF  [0402-TIGHT]  123.25,57.85 180 top
C386  12pF  [0402-TIGHT]  123.25,53.95 180 top
C387  10uF  [0402-TIGHT]  126.55,62.65 0 bottom
C388  2.2uF  [0402-TIGHT]  120.57,58.42 0 top
C389  0.22uF  [0402-TIGHT]  125.35,60.05 90 bottom
C390  0.22uF  [0402-TIGHT]  126.55,60.05 90 bottom
C391  4.7uF  [0402-TIGHT]  126.55,63.85 0 bottom
C392  0.22uF  [0402-TIGHT]  129.15,62.65 180 bottom
C393  10nF  [0402-TIGHT]  131.65,60.05 90 bottom
C394  0.22uF  [0402-TIGHT]  131.65,57.55 270 bottom
C395  4.7uF  [0402-TIGHT]  132.95,57.55 270 bottom
C396  10uF  [0402-TIGHT]  132.95,60.05 90 bottom
C397  0.22uF  [0402-TIGHT]  127.75,57.55 270 bottom
C398  10uF  [0402-TIGHT]  130.35,55.05 270 bottom
C399  0.22uF  [0402-TIGHT]  126.55,57.55 270 bottom
C400  0.22uF  [0402-TIGHT]  126.55,55.05 270 bottom
C401  0.22uF  [0402-TIGHT]  125.35,57.55 90 bottom
C402  0.22uF  [0402-TIGHT]  123.1,57.54 270 bottom
C403  4.7uF  [0402-TIGHT]  124.05,57.55 90 bottom
C404  4.7uF  [0402-TIGHT]  122.15,57.54 270 bottom
C405  0.22uF  [0402-TIGHT]  137.35,49.85 270 top
C406  0.22uF  [0402-TIGHT]  117,63.54 270 bottom
C407  2.2uF  [0402-TIGHT]  151.05,57.55 90 bottom
C408  4.7uF  [0402-TIGHT]  152.35,57.55 90 bottom
C409  0.22uF  [0402-TIGHT]  152.35,60.05 270 bottom
C410  0.22uF  [0402-TIGHT]  147.35,55.05 270 bottom
C411  10nF  [0402-TIGHT]  151.05,60.05 270 bottom
C412  20pF  [0402-TIGHT]  141.35,54.85 90 top
C413  20pF  [0402-TIGHT]  141.35,56.85 270 top
C414  12pF  [0402-TIGHT]  145.25,57.85 180 top
C415  12pF  [0402-TIGHT]  145.25,53.95 180 top
C416  10uF  [0402-TIGHT]  148.55,62.65 0 bottom
C417  2.2uF  [0402-TIGHT]  142.57,58.42 0 top
C418  0.22uF  [0402-TIGHT]  147.35,60.05 90 bottom
C419  0.22uF  [0402-TIGHT]  148.55,60.05 90 bottom
C420  4.7uF  [0402-TIGHT]  148.55,63.85 0 bottom
C421  0.22uF  [0402-TIGHT]  151.15,62.65 180 bottom
C422  10nF  [0402-TIGHT]  153.65,60.05 90 bottom
C423  0.22uF  [0402-TIGHT]  153.65,57.55 270 bottom
C424  4.7uF  [0402-TIGHT]  154.95,57.55 270 bottom
C425  10uF  [0402-TIGHT]  154.95,60.05 90 bottom
C426  0.22uF  [0402-TIGHT]  149.75,57.55 270 bottom
C427  10uF  [0402-TIGHT]  152.35,55.05 270 bottom
C428  0.22uF  [0402-TIGHT]  148.55,57.55 270 bottom
C429  0.22uF  [0402-TIGHT]  148.55,55.05 270 bottom
C430  0.22uF  [0402-TIGHT]  147.35,57.55 90 bottom
C431  0.22uF  [0402-TIGHT]  145.1,57.54 270 bottom
C432  4.7uF  [0402-TIGHT]  146.05,57.55 90 bottom
C433  4.7uF  [0402-TIGHT]  144.15,57.54 270 bottom
C434  0.22uF  [0402-TIGHT]  159.35,49.85 270 top
C435  0.22uF  [0402-TIGHT]  139,63.54 270 bottom
C436  2.2uF  [0402-TIGHT]  173.05,57.55 90 bottom
C437  4.7uF  [0402-TIGHT]  174.35,57.55 90 bottom
C438  0.22uF  [0402-TIGHT]  174.35,60.05 270 bottom
C439  0.22uF  [0402-TIGHT]  169.35,55.05 270 bottom
C440  10nF  [0402-TIGHT]  173.05,60.05 270 bottom
C441  20pF  [0402-TIGHT]  163.35,54.85 90 top
C442  20pF  [0402-TIGHT]  163.35,56.85 270 top
C443  12pF  [0402-TIGHT]  167.25,57.85 180 top
C444  12pF  [0402-TIGHT]  167.25,53.95 180 top
C445  10uF  [0402-TIGHT]  170.55,62.65 0 bottom
C446  2.2uF  [0402-TIGHT]  164.57,58.42 0 top
C447  0.22uF  [0402-TIGHT]  169.35,60.05 90 bottom
C448  0.22uF  [0402-TIGHT]  170.55,60.05 90 bottom
C449  4.7uF  [0402-TIGHT]  170.55,63.85 0 bottom
C450  0.22uF  [0402-TIGHT]  173.15,62.65 180 bottom
C451  10nF  [0402-TIGHT]  175.65,60.05 90 bottom
C452  0.22uF  [0402-TIGHT]  175.65,57.55 270 bottom
C453  4.7uF  [0402-TIGHT]  176.95,57.55 270 bottom
C454  10uF  [0402-TIGHT]  176.95,60.05 90 bottom
C455  0.22uF  [0402-TIGHT]  171.75,57.55 270 bottom
C456  10uF  [0402-TIGHT]  174.35,55.05 270 bottom
C457  0.22uF  [0402-TIGHT]  170.55,57.55 270 bottom
C458  0.22uF  [0402-TIGHT]  170.55,55.05 270 bottom
C459  0.22uF  [0402-TIGHT]  169.35,57.55 90 bottom
C460  0.22uF  [0402-TIGHT]  167.1,57.54 270 bottom
C461  4.7uF  [0402-TIGHT]  168.05,57.55 90 bottom
C462  4.7uF  [0402-TIGHT]  166.15,57.54 270 bottom
C463  0.22uF  [0402-TIGHT]  181.35,49.85 270 top
C464  0.22uF  [0402-TIGHT]  161,63.54 270 bottom
D1  BLUE  [LED-0603]  26.35,21 180 top
D2  120mA/40V/370mV  [SOD-523]  16.95,14.8 270 bottom
D3  120mA/40V/370mV  [SOD-523]  13.05,14.8 270 bottom
D4  120mA/40V/370mV  [SOD-523]  15.65,14.8 90 bottom
D5  Yellow  [LED-0603]  14.35,21 0 top
D6  BLUE  [LED-0603]  48.35,21 180 top
D7  120mA/40V/370mV  [SOD-523]  38.95,14.8 270 bottom
D8  120mA/40V/370mV  [SOD-523]  35.05,14.8 270 bottom
D9  120mA/40V/370mV  [SOD-523]  37.65,14.8 90 bottom
D10  Yellow  [LED-0603]  36.35,21 0 top
D11  BLUE  [LED-0603]  70.35,21 180 top
D12  120mA/40V/370mV  [SOD-523]  60.95,14.8 270 bottom
D13  120mA/40V/370mV  [SOD-523]  57.05,14.8 270 bottom
D14  120mA/40V/370mV  [SOD-523]  59.65,14.8 90 bottom
D15  Yellow  [LED-0603]  58.35,21 0 top
D16  BLUE  [LED-0603]  92.35,21 180 top
D17  120mA/40V/370mV  [SOD-523]  82.95,14.8 270 bottom
D18  120mA/40V/370mV  [SOD-523]  79.05,14.8 270 bottom
D19  120mA/40V/370mV  [SOD-523]  81.65,14.8 90 bottom
D20  Yellow  [LED-0603]  80.35,21 0 top
D21  BLUE  [LED-0603]  114.35,21 180 top
D22  120mA/40V/370mV  [SOD-523]  104.95,14.8 270 bottom
D23  120mA/40V/370mV  [SOD-523]  101.05,14.8 270 bottom
D24  120mA/40V/370mV  [SOD-523]  103.65,14.8 90 bottom
D25  Yellow  [LED-0603]  102.35,21 0 top
D26  BLUE  [LED-0603]  136.35,21 180 top
D27  120mA/40V/370mV  [SOD-523]  126.95,14.8 270 bottom
D28  120mA/40V/370mV  [SOD-523]  123.05,14.8 270 bottom
D29  120mA/40V/370mV  [SOD-523]  125.65,14.8 90 bottom
D30  Yellow  [LED-0603]  124.35,21 0 top
D31  BLUE  [LED-0603]  158.35,21 180 top
D32  120mA/40V/370mV  [SOD-523]  148.95,14.8 270 bottom
D33  120mA/40V/370mV  [SOD-523]  145.05,14.8 270 bottom
D34  120mA/40V/370mV  [SOD-523]  147.65,14.8 90 bottom
D35  Yellow  [LED-0603]  146.35,21 0 top
D36  BLUE  [LED-0603]  180.35,21 180 top
D37  120mA/40V/370mV  [SOD-523]  170.95,14.8 270 bottom
D38  120mA/40V/370mV  [SOD-523]  167.05,14.8 270 bottom
D39  120mA/40V/370mV  [SOD-523]  169.65,14.8 90 bottom
D40  Yellow  [LED-0603]  168.35,21 0 top
D41  BLUE  [LED-0603]  8.35,48.85 0 top
D42  120mA/40V/370mV  [SOD-523]  17.75,55.05 90 bottom
D43  120mA/40V/370mV  [SOD-523]  21.65,55.05 90 bottom
D44  120mA/40V/370mV  [SOD-523]  19.05,55.05 270 bottom
D45  Yellow  [LED-0603]  20.35,48.85 180 top
D46  BLUE  [LED-0603]  30.35,48.85 0 top
D47  120mA/40V/370mV  [SOD-523]  39.75,55.05 90 bottom
D48  120mA/40V/370mV  [SOD-523]  43.65,55.05 90 bottom
D49  120mA/40V/370mV  [SOD-523]  41.05,55.05 270 bottom
D50  Yellow  [LED-0603]  42.35,48.85 180 top
D51  BLUE  [LED-0603]  52.35,48.85 0 top
D52  120mA/40V/370mV  [SOD-523]  61.75,55.05 90 bottom
D53  120mA/40V/370mV  [SOD-523]  65.65,55.05 90 bottom
D54  120mA/40V/370mV  [SOD-523]  63.05,55.05 270 bottom
D55  Yellow  [LED-0603]  64.35,48.85 180 top
D56  BLUE  [LED-0603]  74.35,48.85 0 top
D57  120mA/40V/370mV  [SOD-523]  83.75,55.05 90 bottom
D58  120mA/40V/370mV  [SOD-523]  87.65,55.05 90 bottom
D59  120mA/40V/370mV  [SOD-523]  85.05,55.05 270 bottom
D60  Yellow  [LED-0603]  86.35,48.85 180 top
D61  BLUE  [LED-0603]  96.35,48.85 0 top
D62  120mA/40V/370mV  [SOD-523]  105.75,55.05 90 bottom
D63  120mA/40V/370mV  [SOD-523]  109.65,55.05 90 bottom
D64  120mA/40V/370mV  [SOD-523]  107.05,55.05 270 bottom
D65  Yellow  [LED-0603]  108.35,48.85 180 top
D66  BLUE  [LED-0603]  118.35,48.85 0 top
D67  120mA/40V/370mV  [SOD-523]  127.75,55.05 90 bottom
D68  120mA/40V/370mV  [SOD-523]  131.65,55.05 90 bottom
D69  120mA/40V/370mV  [SOD-523]  129.05,55.05 270 bottom
D70  Yellow  [LED-0603]  130.35,48.85 180 top
D71  BLUE  [LED-0603]  140.35,48.85 0 top
D72  120mA/40V/370mV  [SOD-523]  149.75,55.05 90 bottom
D73  120mA/40V/370mV  [SOD-523]  153.65,55.05 90 bottom
D74  120mA/40V/370mV  [SOD-523]  151.05,55.05 270 bottom
D75  Yellow  [LED-0603]  152.35,48.85 180 top
D76  BLUE  [LED-0603]  162.35,48.85 0 top
D77  120mA/40V/370mV  [SOD-523]  171.75,55.05 90 bottom
D78  120mA/40V/370mV  [SOD-523]  175.65,55.05 90 bottom
D79  120mA/40V/370mV  [SOD-523]  173.05,55.05 270 bottom
D80  Yellow  [LED-0603]  174.35,48.85 180 top
E$1  [FIDUCIAL-1X2]  4.23,63.5 0 top
E$2  [FIDUCIAL-1X2]  4.23,63.5 0 bottom
E$3  [FIDUCIAL-1X2]  184.47,63.5 0 top
E$4  [FIDUCIAL-1X2]  184.47,63.5 0 bottom
E$5  [FIDUCIAL-1.5X3]  4.23,6.35 0 top
E$6  [FIDUCIAL-1.5X3]  4.23,6.35 0 bottom
FB1  120Ω  [0402-TIGHT]  24.13,10.16 180 top
FB2  120Ω  [0402-TIGHT]  15.55,6 180 bottom
FB3  120Ω  [0402-TIGHT]  46.13,10.16 180 top
FB4  120Ω  [0402-TIGHT]  37.55,6 180 bottom
FB5  120Ω  [0402-TIGHT]  68.13,10.16 180 top
FB6  120Ω  [0402-TIGHT]  59.55,6 180 bottom
FB7  120Ω  [0402-TIGHT]  90.13,10.16 180 top
FB8  120Ω  [0402-TIGHT]  81.55,6 180 bottom
FB9  120Ω  [0402-TIGHT]  112.13,10.16 180 top
FB10  120Ω  [0402-TIGHT]  103.55,6 180 bottom
FB11  120Ω  [0402-TIGHT]  134.13,10.16 180 top
FB12  120Ω  [0402-TIGHT]  125.55,6 180 bottom
FB13  120Ω  [0402-TIGHT]  156.13,10.16 180 top
FB14  120Ω  [0402-TIGHT]  147.55,6 180 bottom
FB15  120Ω  [0402-TIGHT]  178.13,10.16 180 top
FB16  120Ω  [0402-TIGHT]  169.55,6 180 bottom
FB17  120Ω  [0402-TIGHT]  10.57,59.69 0 top
FB18  120Ω  [0402-TIGHT]  19.15,63.85 0 bottom
FB19  120Ω  [0402-TIGHT]  32.57,59.69 0 top
FB20  120Ω  [0402-TIGHT]  41.15,63.85 0 bottom
FB21  120Ω  [0402-TIGHT]  54.57,59.69 0 top
FB22  120Ω  [0402-TIGHT]  63.15,63.85 0 bottom
FB23  120Ω  [0402-TIGHT]  76.57,59.69 0 top
FB24  120Ω  [0402-TIGHT]  85.15,63.85 0 bottom
FB25  120Ω  [0402-TIGHT]  98.57,59.69 0 top
FB26  120Ω  [0402-TIGHT]  107.15,63.85 0 bottom
FB27  120Ω  [0402-TIGHT]  120.57,59.69 0 top
FB28  120Ω  [0402-TIGHT]  129.15,63.85 0 bottom
FB29  120Ω  [0402-TIGHT]  142.57,59.69 0 top
FB30  120Ω  [0402-TIGHT]  151.15,63.85 0 bottom
FB31  120Ω  [0402-TIGHT]  164.57,59.69 0 top
FB32  120Ω  [0402-TIGHT]  173.15,63.85 0 bottom
FD1  FIDUCIALUFIDUCIAL  [FIDUCIAL-MICRO]  27.65,5.9 0 top
FD2  FIDUCIALUFIDUCIAL  [FIDUCIAL-MICRO]  8.65,21.3 0 top
FD3  FIDUCIALUFIDUCIAL  [FIDUCIAL-MICRO]  7.35,5 0 bottom
FD4  FIDUCIALUFIDUCIAL  [FIDUCIAL-MICRO]  27.35,21 0 bottom
FD5  FIDUCIALUFIDUCIAL  [FIDUCIAL-MICRO]  49.65,5.9 0 top
FD6  FIDUCIALUFIDUCIAL  [FIDUCIAL-MICRO]  30.65,21.3 0 top
FD7  FIDUCIALUFIDUCIAL  [FIDUCIAL-MICRO]  29.35,5 0 bottom
FD8  FIDUCIALUFIDUCIAL  [FIDUCIAL-MICRO]  49.35,21 0 bottom
FD9  FIDUCIALUFIDUCIAL  [FIDUCIAL-MICRO]  71.65,5.9 0 top
FD10  FIDUCIALUFIDUCIAL  [FIDUCIAL-MICRO]  52.65,21.3 0 top
FD11  FIDUCIALUFIDUCIAL  [FIDUCIAL-MICRO]  51.35,5 0 bottom
FD12  FIDUCIALUFIDUCIAL  [FIDUCIAL-MICRO]  71.35,21 0 bottom
FD13  FIDUCIALUFIDUCIAL  [FIDUCIAL-MICRO]  93.65,5.9 0 top
FD14  FIDUCIALUFIDUCIAL  [FIDUCIAL-MICRO]  74.65,21.3 0 top
FD15  FIDUCIALUFIDUCIAL  [FIDUCIAL-MICRO]  73.35,5 0 bottom
FD16  FIDUCIALUFIDUCIAL  [FIDUCIAL-MICRO]  93.35,21 0 bottom
FD17  FIDUCIALUFIDUCIAL  [FIDUCIAL-MICRO]  115.65,5.9 0 top
FD18  FIDUCIALUFIDUCIAL  [FIDUCIAL-MICRO]  96.65,21.3 0 top
FD19  FIDUCIALUFIDUCIAL  [FIDUCIAL-MICRO]  95.35,5 0 bottom
FD20  FIDUCIALUFIDUCIAL  [FIDUCIAL-MICRO]  115.35,21 0 bottom
FD21  FIDUCIALUFIDUCIAL  [FIDUCIAL-MICRO]  137.65,5.9 0 top
FD22  FIDUCIALUFIDUCIAL  [FIDUCIAL-MICRO]  118.65,21.3 0 top
FD23  FIDUCIALUFIDUCIAL  [FIDUCIAL-MICRO]  117.35,5 0 bottom
FD24  FIDUCIALUFIDUCIAL  [FIDUCIAL-MICRO]  137.35,21 0 bottom
FD25  FIDUCIALUFIDUCIAL  [FIDUCIAL-MICRO]  159.65,5.9 0 top
FD26  FIDUCIALUFIDUCIAL  [FIDUCIAL-MICRO]  140.65,21.3 0 top
FD27  FIDUCIALUFIDUCIAL  [FIDUCIAL-MICRO]  139.35,5 0 bottom
FD28  FIDUCIALUFIDUCIAL  [FIDUCIAL-MICRO]  159.35,21 0 bottom
FD29  FIDUCIALUFIDUCIAL  [FIDUCIAL-MICRO]  181.65,5.9 0 top
FD30  FIDUCIALUFIDUCIAL  [FIDUCIAL-MICRO]  162.65,21.3 0 top
FD31  FIDUCIALUFIDUCIAL  [FIDUCIAL-MICRO]  161.35,5 0 bottom
FD32  FIDUCIALUFIDUCIAL  [FIDUCIAL-MICRO]  181.35,21 0 bottom
FD33  FIDUCIALUFIDUCIAL  [FIDUCIAL-MICRO]  7.05,63.95 180 top
FD34  FIDUCIALUFIDUCIAL  [FIDUCIAL-MICRO]  26.05,48.55 180 top
FD35  FIDUCIALUFIDUCIAL  [FIDUCIAL-MICRO]  27.35,64.85 180 bottom
FD36  FIDUCIALUFIDUCIAL  [FIDUCIAL-MICRO]  7.35,48.85 180 bottom
FD37  FIDUCIALUFIDUCIAL  [FIDUCIAL-MICRO]  29.05,63.95 180 top
FD38  FIDUCIALUFIDUCIAL  [FIDUCIAL-MICRO]  48.05,48.55 180 top
FD39  FIDUCIALUFIDUCIAL  [FIDUCIAL-MICRO]  49.35,64.85 180 bottom
FD40  FIDUCIALUFIDUCIAL  [FIDUCIAL-MICRO]  29.35,48.85 180 bottom
FD41  FIDUCIALUFIDUCIAL  [FIDUCIAL-MICRO]  51.05,63.95 180 top
FD42  FIDUCIALUFIDUCIAL  [FIDUCIAL-MICRO]  70.05,48.55 180 top
FD43  FIDUCIALUFIDUCIAL  [FIDUCIAL-MICRO]  71.35,64.85 180 bottom
FD44  FIDUCIALUFIDUCIAL  [FIDUCIAL-MICRO]  51.35,48.85 180 bottom
FD45  FIDUCIALUFIDUCIAL  [FIDUCIAL-MICRO]  73.05,63.95 180 top
FD46  FIDUCIALUFIDUCIAL  [FIDUCIAL-MICRO]  92.05,48.55 180 top
FD47  FIDUCIALUFIDUCIAL  [FIDUCIAL-MICRO]  93.35,64.85 180 bottom
FD48  FIDUCIALUFIDUCIAL  [FIDUCIAL-MICRO]  73.35,48.85 180 bottom
FD49  FIDUCIALUFIDUCIAL  [FIDUCIAL-MICRO]  95.05,63.95 180 top
FD50  FIDUCIALUFIDUCIAL  [FIDUCIAL-MICRO]  114.05,48.55 180 top
FD51  FIDUCIALUFIDUCIAL  [FIDUCIAL-MICRO]  115.35,64.85 180 bottom
FD52  FIDUCIALUFIDUCIAL  [FIDUCIAL-MICRO]  95.35,48.85 180 bottom
FD53  FIDUCIALUFIDUCIAL  [FIDUCIAL-MICRO]  117.05,63.95 180 top
FD54  FIDUCIALUFIDUCIAL  [FIDUCIAL-MICRO]  136.05,48.55 180 top
FD55  FIDUCIALUFIDUCIAL  [FIDUCIAL-MICRO]  137.35,64.85 180 bottom
FD56  FIDUCIALUFIDUCIAL  [FIDUCIAL-MICRO]  117.35,48.85 180 bottom
FD57  FIDUCIALUFIDUCIAL  [FIDUCIAL-MICRO]  139.05,63.95 180 top
FD58  FIDUCIALUFIDUCIAL  [FIDUCIAL-MICRO]  158.05,48.55 180 top
FD59  FIDUCIALUFIDUCIAL  [FIDUCIAL-MICRO]  159.35,64.85 180 bottom
FD60  FIDUCIALUFIDUCIAL  [FIDUCIAL-MICRO]  139.35,48.85 180 bottom
FD61  FIDUCIALUFIDUCIAL  [FIDUCIAL-MICRO]  161.05,63.95 180 top
FD62  FIDUCIALUFIDUCIAL  [FIDUCIAL-MICRO]  180.05,48.55 180 top
FD63  FIDUCIALUFIDUCIAL  [FIDUCIAL-MICRO]  181.35,64.85 180 bottom
FD64  FIDUCIALUFIDUCIAL  [FIDUCIAL-MICRO]  161.35,48.85 180 bottom
J1  MICROMOD-2222  [M.2-CARD-E-22]  17.35,0.01 0 top
J2  MICROMOD-2222  [M.2-CARD-E-22]  39.35,0.01 0 top
J3  MICROMOD-2222  [M.2-CARD-E-22]  61.35,0.01 0 top
J4  MICROMOD-2222  [M.2-CARD-E-22]  83.35,0.01 0 top
J5  MICROMOD-2222  [M.2-CARD-E-22]  105.35,0.01 0 top
J6  MICROMOD-2222  [M.2-CARD-E-22]  127.35,0.01 0 top
J7  MICROMOD-2222  [M.2-CARD-E-22]  149.35,0.01 0 top
J8  MICROMOD-2222  [M.2-CARD-E-22]  171.35,0.01 0 top
J9  MICROMOD-2222  [M.2-CARD-E-22]  17.35,69.84 180 top
J10  MICROMOD-2222  [M.2-CARD-E-22]  39.35,69.84 180 top
J11  MICROMOD-2222  [M.2-CARD-E-22]  61.35,69.84 180 top
J12  MICROMOD-2222  [M.2-CARD-E-22]  83.35,69.84 180 top
J13  MICROMOD-2222  [M.2-CARD-E-22]  105.35,69.84 180 top
J14  MICROMOD-2222  [M.2-CARD-E-22]  127.35,69.84 180 top
J15  MICROMOD-2222  [M.2-CARD-E-22]  149.35,69.84 180 top
J16  MICROMOD-2222  [M.2-CARD-E-22]  171.35,69.84 180 top
L1  4.7μH  [1008(2520)]  44.6,7.36 90 top
L2  4.7μH  [1008(2520)]  22.6,7.36 90 top
L3  4.7μH  [1008(2520)]  66.6,7.36 90 top
L4  4.7μH  [1008(2520)]  88.6,7.36 90 top
L5  4.7μH  [1008(2520)]  110.6,7.36 90 top
L6  4.7μH  [1008(2520)]  132.6,7.36 90 top
L7  4.7μH  [1008(2520)]  154.6,7.36 90 top
L8  4.7μH  [1008(2520)]  176.6,7.36 90 top
L9  4.7μH  [1008(2520)]  12.1,62.49 270 top
L10  4.7μH  [1008(2520)]  34.1,62.49 270 top
L11  4.7μH  [1008(2520)]  56.1,62.49 270 top
L12  4.7μH  [1008(2520)]  78.1,62.49 270 top
L13  4.7μH  [1008(2520)]  100.1,62.49 270 top
L14  4.7μH  [1008(2520)]  122.1,62.49 270 top
L15  4.7μH  [1008(2520)]  144.1,62.49 270 top
L16  4.7μH  [1008(2520)]  166.1,62.49 270 top
LOGO1  SFE_LOGO_NAME_FLAME.1_INCH  [SFE_LOGO_NAME_FLAME_.1]  13.05,18.1 0 bottom
LOGO2  SFE_LOGO_NAME_FLAME.1_INCH  [SFE_LOGO_NAME_FLAME_.1]  35.05,18.1 0 bottom
LOGO3  SFE_LOGO_NAME_FLAME.1_INCH  [SFE_LOGO_NAME_FLAME_.1]  57.05,18.1 0 bottom
LOGO4  SFE_LOGO_NAME_FLAME.1_INCH  [SFE_LOGO_NAME_FLAME_.1]  79.05,18.1 0 bottom
LOGO5  SFE_LOGO_NAME_FLAME.1_INCH  [SFE_LOGO_NAME_FLAME_.1]  101.05,18.1 0 bottom
LOGO6  SFE_LOGO_NAME_FLAME.1_INCH  [SFE_LOGO_NAME_FLAME_.1]  123.05,18.1 0 bottom
LOGO7  SFE_LOGO_NAME_FLAME.1_INCH  [SFE_LOGO_NAME_FLAME_.1]  145.05,18.1 0 bottom
LOGO8  SFE_LOGO_NAME_FLAME.1_INCH  [SFE_LOGO_NAME_FLAME_.1]  167.05,18.1 0 bottom
LOGO9  SFE_LOGO_NAME_FLAME.1_INCH  [SFE_LOGO_NAME_FLAME_.1]  21.65,51.75 180 bottom
LOGO10  SFE_LOGO_NAME_FLAME.1_INCH  [SFE_LOGO_NAME_FLAME_.1]  43.65,51.75 180 bottom
LOGO11  SFE_LOGO_NAME_FLAME.1_INCH  [SFE_LOGO_NAME_FLAME_.1]  65.65,51.75 180 bottom
LOGO12  SFE_LOGO_NAME_FLAME.1_INCH  [SFE_LOGO_NAME_FLAME_.1]  87.65,51.75 180 bottom
LOGO13  SFE_LOGO_NAME_FLAME.1_INCH  [SFE_LOGO_NAME_FLAME_.1]  109.65,51.75 180 bottom
LOGO14  SFE_LOGO_NAME_FLAME.1_INCH  [SFE_LOGO_NAME_FLAME_.1]  131.65,51.75 180 bottom
LOGO15  SFE_LOGO_NAME_FLAME.1_INCH  [SFE_LOGO_NAME_FLAME_.1]  153.65,51.75 180 bottom
LOGO16  SFE_LOGO_NAME_FLAME.1_INCH  [SFE_LOGO_NAME_FLAME_.1]  175.65,51.75 180 bottom
MEAS  [SMT-JUMPER_2_NC_TRACE_SILK]  26.95,12.45 90 bottom
MEAS1  [SMT-JUMPER_2_NC_TRACE_SILK]  48.95,12.45 90 bottom
MEAS2  [SMT-JUMPER_2_NC_TRACE_SILK]  70.95,12.45 90 bottom
MEAS3  [SMT-JUMPER_2_NC_TRACE_SILK]  92.95,12.45 90 bottom
MEAS4  [SMT-JUMPER_2_NC_TRACE_SILK]  114.95,12.45 90 bottom
MEAS5  [SMT-JUMPER_2_NC_TRACE_SILK]  136.95,12.45 90 bottom
MEAS6  [SMT-JUMPER_2_NC_TRACE_SILK]  158.95,12.45 90 bottom
MEAS7  [SMT-JUMPER_2_NC_TRACE_SILK]  180.95,12.45 90 bottom
MEAS8  [SMT-JUMPER_2_NC_TRACE_SILK]  7.75,57.4 270 bottom
MEAS9  [SMT-JUMPER_2_NC_TRACE_SILK]  29.75,57.4 270 bottom
MEAS10  [SMT-JUMPER_2_NC_TRACE_SILK]  51.75,57.4 270 bottom
MEAS11  [SMT-JUMPER_2_NC_TRACE_SILK]  73.75,57.4 270 bottom
MEAS12  [SMT-JUMPER_2_NC_TRACE_SILK]  95.75,57.4 270 bottom
MEAS13  [SMT-JUMPER_2_NC_TRACE_SILK]  117.75,57.4 270 bottom
MEAS14  [SMT-JUMPER_2_NC_TRACE_SILK]  139.75,57.4 270 bottom
MEAS15  [SMT-JUMPER_2_NC_TRACE_SILK]  161.75,57.4 270 bottom
Q1  20V/4.2A/52mΩ/1.4W  [SOT23-3]  8.89,13.97 0 bottom
Q2  20V/0.2A/8MHz/1.2Ω/1Vth  [SOT-416FL]  8.89,10.16 0 bottom
Q3  20V/4.2A/52mΩ/1.4W  [SOT23-3]  30.89,13.97 0 bottom
Q4  20V/0.2A/8MHz/1.2Ω/1Vth  [SOT-416FL]  30.89,10.16 0 bottom
Q5  20V/4.2A/52mΩ/1.4W  [SOT23-3]  52.89,13.97 0 bottom
Q6  20V/0.2A/8MHz/1.2Ω/1Vth  [SOT-416FL]  52.89,10.16 0 bottom
Q7  20V/4.2A/52mΩ/1.4W  [SOT23-3]  74.89,13.97 0 bottom
Q8  20V/0.2A/8MHz/1.2Ω/1Vth  [SOT-416FL]  74.89,10.16 0 bottom
Q9  20V/4.2A/52mΩ/1.4W  [SOT23-3]  96.89,13.97 0 bottom
Q10  20V/0.2A/8MHz/1.2Ω/1Vth  [SOT-416FL]  96.89,10.16 0 bottom
Q11  20V/4.2A/52mΩ/1.4W  [SOT23-3]  118.89,13.97 0 bottom
Q12  20V/0.2A/8MHz/1.2Ω/1Vth  [SOT-416FL]  118.89,10.16 0 bottom
Q13  20V/4.2A/52mΩ/1.4W  [SOT23-3]  140.89,13.97 0 bottom
Q14  20V/0.2A/8MHz/1.2Ω/1Vth  [SOT-416FL]  140.89,10.16 0 bottom
Q15  20V/4.2A/52mΩ/1.4W  [SOT23-3]  162.89,13.97 0 bottom
Q16  20V/0.2A/8MHz/1.2Ω/1Vth  [SOT-416FL]  162.89,10.16 0 bottom
Q17  20V/4.2A/52mΩ/1.4W  [SOT23-3]  25.81,55.88 180 bottom
Q18  20V/0.2A/8MHz/1.2Ω/1Vth  [SOT-416FL]  25.81,59.69 180 bottom
Q19  20V/4.2A/52mΩ/1.4W  [SOT23-3]  47.81,55.88 180 bottom
Q20  20V/0.2A/8MHz/1.2Ω/1Vth  [SOT-416FL]  47.81,59.69 180 bottom
Q21  20V/4.2A/52mΩ/1.4W  [SOT23-3]  69.81,55.88 180 bottom
Q22  20V/0.2A/8MHz/1.2Ω/1Vth  [SOT-416FL]  69.81,59.69 180 bottom
Q23  20V/4.2A/52mΩ/1.4W  [SOT23-3]  91.81,55.88 180 bottom
Q24  20V/0.2A/8MHz/1.2Ω/1Vth  [SOT-416FL]  91.81,59.69 180 bottom
Q25  20V/4.2A/52mΩ/1.4W  [SOT23-3]  113.81,55.88 180 bottom
Q26  20V/0.2A/8MHz/1.2Ω/1Vth  [SOT-416FL]  113.81,59.69 180 bottom
Q27  20V/4.2A/52mΩ/1.4W  [SOT23-3]  135.81,55.88 180 bottom
Q28  20V/0.2A/8MHz/1.2Ω/1Vth  [SOT-416FL]  135.81,59.69 180 bottom
Q29  20V/4.2A/52mΩ/1.4W  [SOT23-3]  157.81,55.88 180 bottom
Q30  20V/0.2A/8MHz/1.2Ω/1Vth  [SOT-416FL]  157.81,59.69 180 bottom
Q31  20V/4.2A/52mΩ/1.4W  [SOT23-3]  179.81,55.88 180 bottom
Q32  20V/0.2A/8MHz/1.2Ω/1Vth  [SOT-416FL]  179.81,59.69 180 bottom
R1  1k  [0402-TIGHT]  27.35,10 270 top
R2  100k  [0402-TIGHT]  8.89,11.43 180 bottom
R3  1k  [0402-TIGHT]  49.35,10 270 top
R4  2.2M  [0402-TIGHT]  20,14 270 top
R5  100k  [0402-TIGHT]  7.35,18 270 top
R6  100k  [0402-TIGHT]  16.95,9.8 90 bottom
R7  1k  [0402-TIGHT]  17.35,21 180 top
R8  2.2M  [0402-TIGHT]  42,14 270 top
R9  100k  [0402-TIGHT]  29.35,18 270 top
R10  100k  [0402-TIGHT]  38.95,9.8 90 bottom
R11  1k  [0402-TIGHT]  39.35,21 180 top
R12  100k  [0402-TIGHT]  30.89,11.43 180 bottom
R13  1k  [0402-TIGHT]  71.35,10 270 top
R14  2.2M  [0402-TIGHT]  64,14 270 top
R15  100k  [0402-TIGHT]  51.35,18 270 top
R16  100k  [0402-TIGHT]  60.95,9.8 90 bottom
R17  1k  [0402-TIGHT]  61.35,21 180 top
R18  100k  [0402-TIGHT]  52.89,11.43 180 bottom
R19  1k  [0402-TIGHT]  93.35,10 270 top
R20  2.2M  [0402-TIGHT]  86,14 270 top
R21  100k  [0402-TIGHT]  73.35,18 270 top
R22  100k  [0402-TIGHT]  82.95,9.8 90 bottom
R23  1k  [0402-TIGHT]  83.35,21 180 top
R24  100k  [0402-TIGHT]  74.89,11.43 180 bottom
R25  1k  [0402-TIGHT]  115.35,10 270 top
R26  2.2M  [0402-TIGHT]  108,14 270 top
R27  100k  [0402-TIGHT]  95.35,18 270 top
R28  100k  [0402-TIGHT]  104.95,9.8 90 bottom
R29  1k  [0402-TIGHT]  105.35,21 180 top
R30  100k  [0402-TIGHT]  96.89,11.43 180 bottom
R31  1k  [0402-TIGHT]  137.35,10 270 top
R32  2.2M  [0402-TIGHT]  130,14 270 top
R33  100k  [0402-TIGHT]  117.35,18 270 top
R34  100k  [0402-TIGHT]  126.95,9.8 90 bottom
R35  1k  [0402-TIGHT]  127.35,21 180 top
R36  100k  [0402-TIGHT]  118.89,11.43 180 bottom
R37  1k  [0402-TIGHT]  159.35,10 270 top
R38  2.2M  [0402-TIGHT]  152,14 270 top
R39  100k  [0402-TIGHT]  139.35,18 270 top
R40  100k  [0402-TIGHT]  148.95,9.8 90 bottom
R41  1k  [0402-TIGHT]  149.35,21 180 top
R42  100k  [0402-TIGHT]  140.89,11.43 180 bottom
R43  1k  [0402-TIGHT]  181.35,10 270 top
R44  2.2M  [0402-TIGHT]  174,14 270 top
R45  100k  [0402-TIGHT]  161.35,18 270 top
R46  100k  [0402-TIGHT]  170.95,9.8 90 bottom
R47  1k  [0402-TIGHT]  171.35,21 180 top
R48  100k  [0402-TIGHT]  162.89,11.43 180 bottom
R49  1k  [0402-TIGHT]  7.35,59.85 90 top
R50  2.2M  [0402-TIGHT]  14.7,55.85 90 top
R51  100k  [0402-TIGHT]  27.35,51.85 90 top
R52  100k  [0402-TIGHT]  17.75,60.05 270 bottom
R53  1k  [0402-TIGHT]  17.35,48.85 0 top
R54  100k  [0402-TIGHT]  25.81,58.42 0 bottom
R55  1k  [0402-TIGHT]  29.35,59.85 90 top
R56  2.2M  [0402-TIGHT]  36.7,55.85 90 top
R57  100k  [0402-TIGHT]  49.35,51.85 90 top
R58  100k  [0402-TIGHT]  39.75,60.05 270 bottom
R59  1k  [0402-TIGHT]  39.35,48.85 0 top
R60  100k  [0402-TIGHT]  47.81,58.42 0 bottom
R61  1k  [0402-TIGHT]  51.35,59.85 90 top
R62  2.2M  [0402-TIGHT]  58.7,55.85 90 top
R63  100k  [0402-TIGHT]  71.35,51.85 90 top
R64  100k  [0402-TIGHT]  61.75,60.05 270 bottom
R65  1k  [0402-TIGHT]  61.35,48.85 0 top
R66  100k  [0402-TIGHT]  69.81,58.42 0 bottom
R67  1k  [0402-TIGHT]  73.35,59.85 90 top
R68  2.2M  [0402-TIGHT]  80.7,55.85 90 top
R69  100k  [0402-TIGHT]  93.35,51.85 90 top
R70  100k  [0402-TIGHT]  83.75,60.05 270 bottom
R71  1k  [0402-TIGHT]  83.35,48.85 0 top
R72  100k  [0402-TIGHT]  91.81,58.42 0 bottom
R73  1k  [0402-TIGHT]  95.35,59.85 90 top
R74  2.2M  [0402-TIGHT]  102.7,55.85 90 top
R75  100k  [0402-TIGHT]  115.35,51.85 90 top
R76  100k  [0402-TIGHT]  105.75,60.05 270 bottom
R77  1k  [0402-TIGHT]  105.35,48.85 0 top
R78  100k  [0402-TIGHT]  113.81,58.42 0 bottom
R79  1k  [0402-TIGHT]  117.35,59.85 90 top
R80  2.2M  [0402-TIGHT]  124.7,55.85 90 top
R81  100k  [0402-TIGHT]  137.35,51.85 90 top
R82  100k  [0402-TIGHT]  127.75,60.05 270 bottom
R83  1k  [0402-TIGHT]  127.35,48.85 0 top
R84  100k  [0402-TIGHT]  135.81,58.42 0 bottom
R85  1k  [0402-TIGHT]  139.35,59.85 90 top
R86  2.2M  [0402-TIGHT]  146.7,55.85 90 top
R87  100k  [0402-TIGHT]  159.35,51.85 90 top
R88  100k  [0402-TIGHT]  149.75,60.05 270 bottom
R89  1k  [0402-TIGHT]  149.35,48.85 0 top
R90  100k  [0402-TIGHT]  157.81,58.42 0 bottom
R91  1k  [0402-TIGHT]  161.35,59.85 90 top
R92  2.2M  [0402-TIGHT]  168.7,55.85 90 top
R93  100k  [0402-TIGHT]  181.35,51.85 90 top
R94  100k  [0402-TIGHT]  171.75,60.05 270 bottom
R95  1k  [0402-TIGHT]  171.35,48.85 0 top
R96  100k  [0402-TIGHT]  179.81,58.42 0 bottom
TP1  [PAD.03X.03]  18.75,16.61 270 bottom
TP2  [PAD.03X.03]  7.9,10.65 0 bottom
TP3  [PAD.03X.03]  17.35,8.26 90 bottom
TP4  [PAD.03X.03]  11.91,15.45 0 bottom
TP5  [PAD.03X.03]  15.25,16.7 0 bottom
TP6  [PAD.03X.03]  20.35,14.55 0 bottom
TP7  [PAD.03X.03]  23.15,13.9 0 bottom
TP8  [PAD.03X.03]  8.35,16.6 0 bottom
TP9  [PAD.03X.03]  10.09,19.5 0 bottom
TP10  [PAD.03X.03]  13.65,11 270 bottom
TP11  [PAD.03X.03]  13.49,20.13 270 bottom
TP12  [PAD.03X.03]  7.79,21.29 0 bottom
TP13  [PAD.03X.03]  17.11,21.14 0 bottom
TP14  [PAD.03X.03]  40.75,16.61 270 bottom
TP15  [PAD.03X.03]  39.35,8.26 90 bottom
TP16  [PAD.03X.03]  33.91,15.45 0 bottom
TP17  [PAD.03X.03]  37.25,16.7 0 bottom
TP18  [PAD.03X.03]  42.35,14.55 0 bottom
TP19  [PAD.03X.03]  45.15,13.9 0 bottom
TP20  [PAD.03X.03]  30.35,16.6 0 bottom
TP21  [PAD.03X.03]  32.08,19.5 0 bottom